# Altium PCB PCB1.PcbDoc (part 3 of 3)
Units mil, origin at the board's own origin, x right, y up, seen from the top; angles counter-clockwise.
Board outline 3051.58 x 3543.22 mil, 2 copper layers (Top Layer, Bottom Layer), stack 22.441 mil thick; 24 components, 24 nets, 64 pads, 1 vias.
Unrouted connection lines stored in the file: 1.
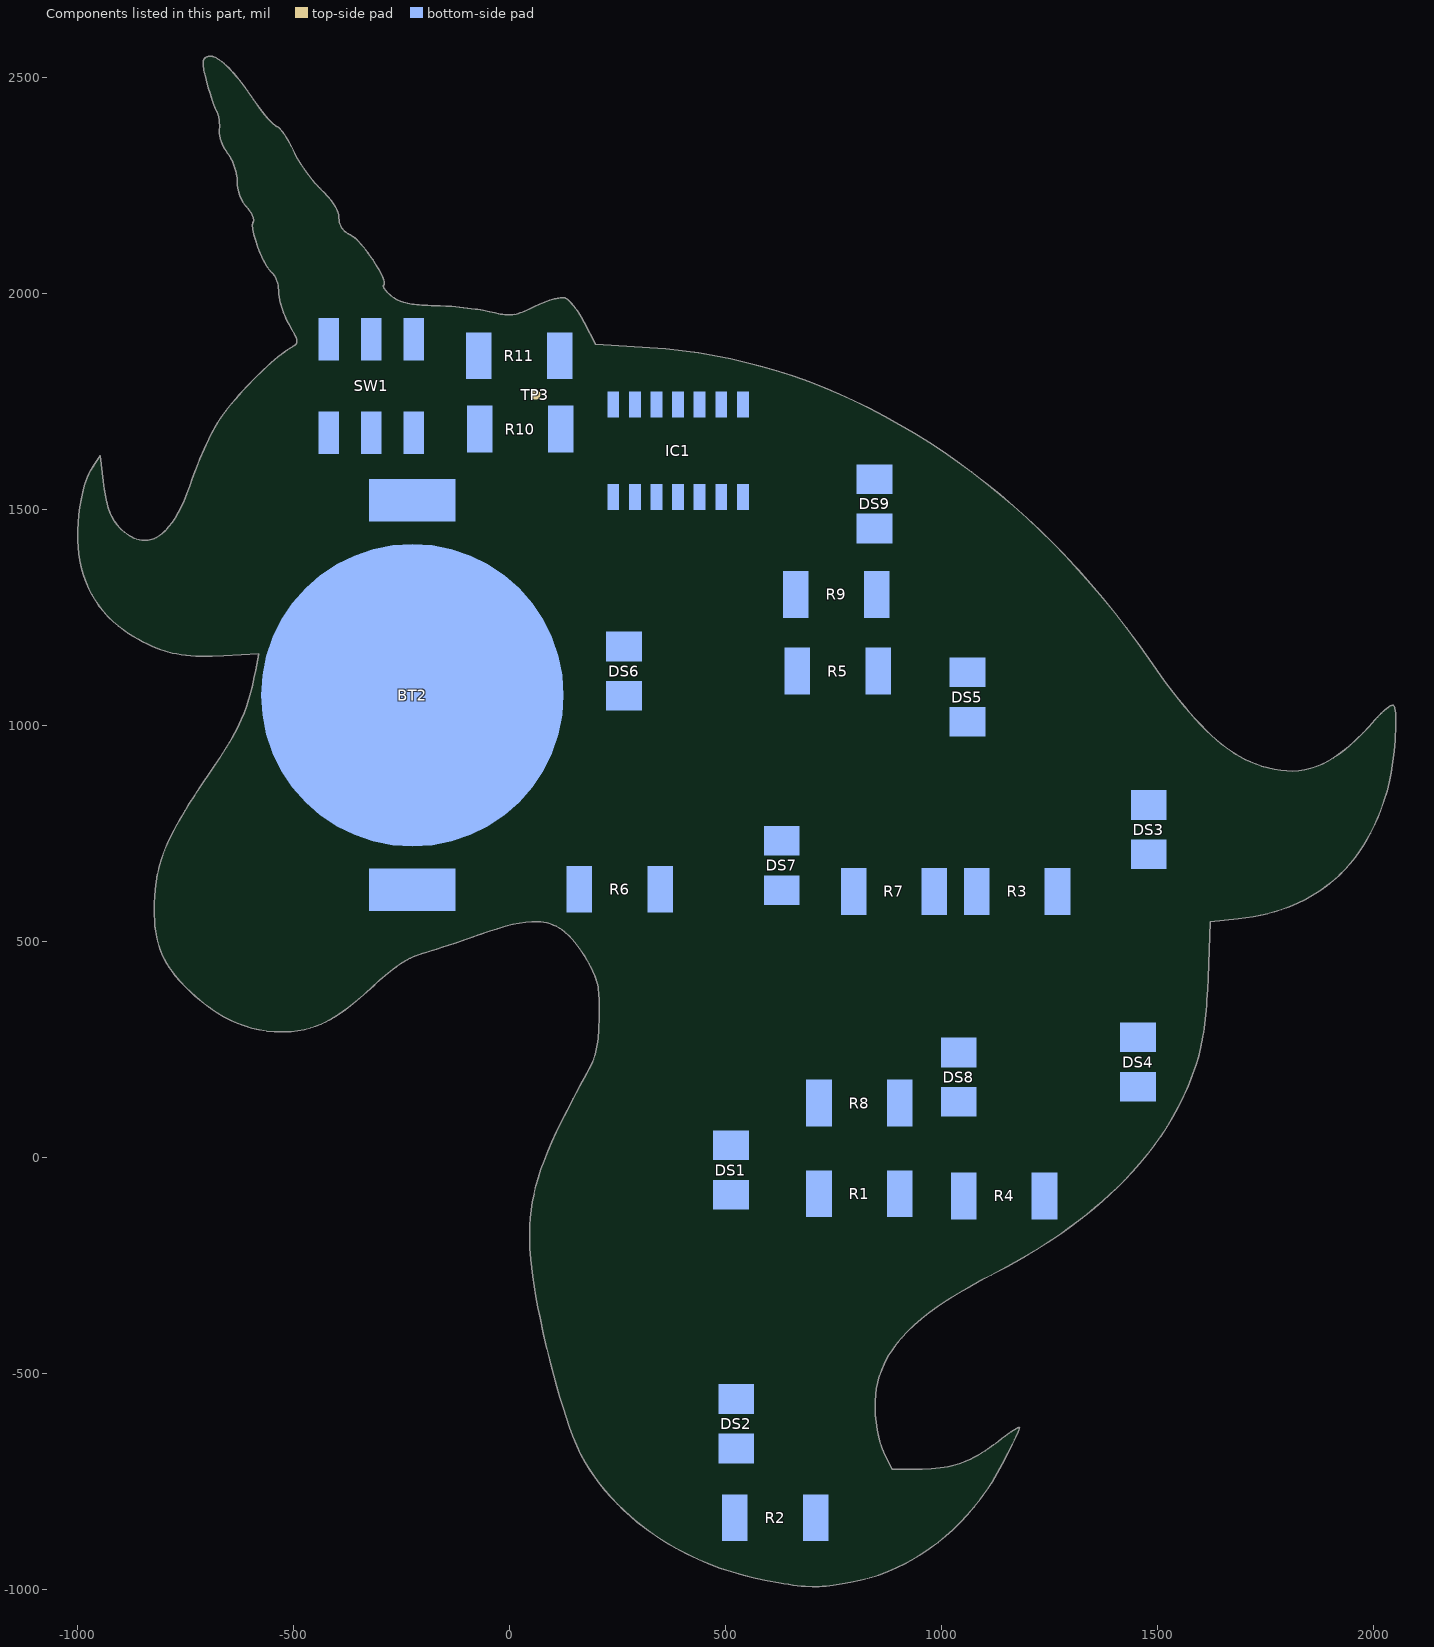
[diagram p3: the components of this part, seen from the top]

## Keep-outs (continued)
Keep-Out Layer: (continued)
  lines w5: 1193.4,-655.34 1196.64,-648.13 ; 1196.64,-648.13 ccw(c1176.13,-638.89) 1196.71,-647.98 ; 1196.64,-648.13 ccw(c1176.13,-638.89) 1196.71,-647.98 ; 1498.02,1166.8 cw(c1479.49,1154.04) 1498.04,1166.78 ; 1498.02,1166.8 cw(c1479.49,1154.04) 1498.04,1166.78 ; 1498.04,1166.78 ccw(c3006.54,2202.82) 1554.33,1089.25 ; 1525.66,34.72 ccw(c875.63,482.19) 1525.69,34.77 ; 1525.66,34.72 ccw(c1507.16,47.53) 1525.68,34.76 ; 1525.68,34.76 ccw(c976.26,413.63) 1611.01,207.46 ccw(c1589.61,214.41) 1611.03,207.51 ccw(c1218.62,333.9) 1615.79,223.39 ; 1554.34,1089.23 ccw(c2460.6,1787.08) 1580.13,1056.97 ; 1554.34,1089.23 ccw(c1536.51,1075.51) 1554.33,1089.25 ; 1580.17,1056.92 ccw(c2228.52,1594.47) 1604.68,1028.65 ; 1580.17,1056.92 cw(c2460.6,1787.08) 1580.13,1056.97 ; 1580.17,1056.92 ccw(c1562.85,1042.55) 1580.17,1056.92 ; 1580.17,1056.92 ccw(c1562.85,1042.55) 1580.13,1056.97 ; 1604.68,1028.65 ccw(c2068.92,1449.61) 1604.73,1028.6 ; 1604.68,1028.65 cw(c1588.02,1013.54) 1604.73,1028.6 ; 1604.68,1028.65 ccw(c1588.02,1013.54) 1604.68,1028.65 ; 1604.73,1028.6 ccw(c2068.92,1449.61) 1628.06,1004.23 ; 1615.79,223.39 ccw(c1180.16,344.59) 1620.08,240.01 ; 1615.79,223.39 ccw(c1594.11,229.42) 1615.79,223.39 ; 1620.08,240.02 ccw(c1125.73,357.51) 1620.09,240.08 ; 1620.08,240.01 ccw(c1598.19,245.22) 1620.09,240.08 ; 1620.09,240.08 ccw(c1125.73,357.51) 1623.91,257.5 ccw(c1050.46,372.62) 1627.31,275.95 ccw(c950.57,389.37) 1630.29,295.47 ccw(c818.89,407.6) 1632.88,316.19 ccw(c646.62,426.99) 1635.11,338.22 ccw(c421.91,447.23) 1636.99,361.61 ; 1628.06,1004.23 ccw(c1961.38,1340.91) 1650.46,983.44 ; 1628.06,1004.23 ccw(c1612.23,988.24) 1628.06,1004.23 ; 1628.06,1004.23 ccw(c1612.23,988.24) 1628.06,1004.23 ; 1636.99,361.61 ccw(c1614.54,363.26) 1636.99,361.69 ; 1636.99,361.61 ccw(c421.91,447.23) 1636.99,361.68 ; 1650.46,983.44 cw(c1635.69,966.47) 1650.51,983.4 ; 1650.46,983.44 ccw(c1891.27,1260.29) 1650.51,983.4 ; 1650.51,983.4 ccw(c1891.27,1260.29) 1672.01,966.08 ; 1672.01,966.08 ccw(c1891.27,1260.29) 1672.06,966.04 ; 1672.01,966.08 cw(c1658.62,948) 1672.06,966.04 ; 1672.06,966.04 ccw(c1848.19,1202.51) 1693.06,951.77 ; 1693.05,951.77 ccw(c1824.15,1163.79) 1693.11,951.74 ; 1693.06,951.77 cw(c1681.22,932.63) 1693.11,951.74 ; 1693.11,951.74 ccw(c1824.15,1163.79) 1713.62,940.36 ; 1713.62,940.36 ccw(c1824.15,1163.79) 1713.67,940.33 ; 1713.62,940.36 cw(c1703.7,920.16) 1713.67,940.33 ; 1713.67,940.33 ccw(c1813.35,1142.16) 1734.14,931.46 ; 1734.14,931.46 ccw(c1813.35,1142.16) 1734.2,931.43 cw(c1726.28,910.37) 1734.49,931.32 ; 1734.14,931.46 cw(c1726.28,910.37) 1734.43,931.34 ccw(c1821.55,1155.58) 1734.49,931.32 ; 1734.49,931.32 ccw(c1821.55,1155.58) 1788.62,917.28 ccw(c1808.95,1076.63) 1812.77,916.03 ; 1743.66,538.02 ccw(c1645.57,998.62) 1793.99,551.69 ; 1743.66,538.02 ccw(c1738.97,560.03) 1743.66,538.02 ; 1793.99,551.69 ccw(c1677.37,911.14) 1921.93,623.06 ccw(c1907.37,640.21) 1922.06,623.17 ccw(c1678.66,905.51) 1986.96,695.96 ; 1812.77,916.03 ccw(c1807.95,1066.81) 1881.98,935.37 ; 1881.98,935.37 cw(c1893.09,915.8) 1882.29,935.54 ; 1881.98,935.37 ccw(c1807.95,1066.81) 1882.04,935.4 cw(c1893.09,915.8) 1882.29,935.54 ; 1882.29,935.54 ccw(c1770.6,1139.7) 1906.46,950.77 ; 1906.46,950.77 ccw(c1713.84,1218.7) 1906.52,950.81 ; 1906.46,950.77 cw(c1919.6,932.5) 1906.52,950.81 ; 1906.46,950.77 ccw(c1919.6,932.5) 1906.46,950.77 ; 1906.52,950.81 ccw(c1713.84,1218.7) 1931.75,970.89 ; 1931.75,970.89 ccw(c1713.84,1218.7) 1931.79,970.94 ; 1931.75,970.89 cw(c1946.66,954.04) 1931.8,970.94 ; 1931.8,970.94 ccw(c1611.48,1335.32) 1958.47,996.24 ; 1931.8,970.94 ccw(c1946.66,954.04) 1931.79,970.94 ; 1958.47,996.24 ccw(c1611.48,1335.32) 1958.51,996.28 ; 1958.47,996.24 cw(c1974.61,980.56) 1958.52,996.29 ; 1958.52,996.29 ccw(c1438.66,1504.56) 1986.82,1026.96 cw(c2003.79,1012.18) 1986.89,1027.03 ; 1958.52,996.29 ccw(c1974.61,980.56) 1958.51,996.28 ; 1986.96,695.96 ccw(c1678.66,905.51) 1986.96,695.96 ; 2016.95,1056.41 ccw(c2083.08,973.02) 2016.94,1056.4 ; 2016.95,1056.41 cw(c2083.08,973.02) 2022.48,1060.51 cw(c2035.29,1042.02) 2022.51,1060.53 ; 2016.95,1056.41 ccw(c2111.6,936.88) 2016.95,1056.41 ; 2022.51,1060.53 cw(c2061.79,1003.93) 2028.06,1064.01 ; 2028.06,1064.01 cw(c2049.38,1026.33) 2034.45,1066.96 ; 2034.45,1066.96 cw(c2044.8,1039.29) 2044.33,1068.83 ; 2044.33,1068.83 cw(c2044.77,1044.07) 2061.6,1062.24 ; 2061.6,1062.24 ccw(c2044.77,1044.07) 2061.6,1062.24 ; 2061.6,1062.24 cw(c2046.31,1045.73) 2065.89,1056.82 cw(c2013.78,1027.3) 2073.67,1027.3 cw(c2013.78,1027.3) 2073.67,1026.91 cw(c1815.28,1008.29) 2074.34,1009.09 ; 2073.95,987.25 ccw(c1599.68,1006.65) 2074.34,1006.65 ccw(c1599.68,1006.65) 2074.34,1009.09 ; 2073.95,987.23 ccw(c1599.68,1006.65) 2073.95,987.25 ; 2074.34,1009.09 ccw(c1599.68,1006.65) 2074.34,1009.12

## Other copper
Top Layer:
  region net AIN6: 1206 vertices and 0 holes, not listed, extent -41.25,1615.18 129.92,1865.32
  region: 788 vertices and 0 holes, not listed, extent -509.92,1907.35 -276.48,2002.33
  region: 1011 vertices and 0 holes, not listed, extent -573.24,2016.94 -314.75,2152.62
  region: 847 vertices and 0 holes, not listed, extent -608.38,2156.45 -415.64,2267.08
  region: 727 vertices and 0 holes, not listed, extent -691.87,2413.55 -598.64,2527.66
  region: 669 vertices and 0 holes, not listed, extent -652.56,2295.61 -507.49,2385.02
  region: -641.82,540.56 -643.55,538.83 -645.99,537.79 -646.68,536.4 -649.11,534.66 -651.89,531.88 -653.28,531.18 -654.67,529.79 -658.15,528.4 -661.62,529.1 -662.66,530.14 -661.97,538.48 -660.58,539.87 -658.84,544.39 -657.1,546.82 -653.98,550.64 -648.42,556.2 -647.03,556.89 -645.64,558.28 -642.16,560.37 -631.74,565.23 -627.23,566.27 -621.32,568.01 -610.9,568.7 -608.81,568.01 -603.95,567.32 -600.48,565.93 -597.7,565.23 -594.22,563.15 -587.97,559.67 -583.45,557.24 -583.1,556.2 -581.71,555.5 -579.28,553.77 -578.94,552.72 -577.55,552.03 -569.56,544.04 -568.86,542.65 -566.08,539.87 -564,536.4 -561.22,531.53 -559.83,530.14 -558.79,525.63 -556.35,519.72 -555.66,510.69 -556.7,499.92 -557.74,498.88 -558.44,497.49 -560.18,495.05 -564,494.01 -568.51,495.75 -572.33,499.57 -574.42,503.04 -575.81,504.43 -576.85,508.26 -579.28,512.77 -580.33,517.98 -582.06,521.8 -582.76,524.58 -586.93,532.23 -588.32,533.62 -589.01,535.01 -592.83,538.83 -594.22,539.52 -596.31,541.61 -603.95,545.08 -606.73,545.78 -610.55,546.82 -613.33,547.51 -622.01,547.86 -624.1,547.17 -627.92,546.12 -631.39,545.43 -634.17,544.73 -638.69,542.3 -641.47,540.91
  region: 299 vertices and 0 holes, not listed, extent -306.22,1002.97 53.7,1203.78
  region net AIN6: 161 vertices and 1 holes, not listed, extent -58.86,1597.05 147.5,1886.79
  region: 2749 vertices and 14 holes, not listed, extent -999.65,-995.35 2052.02,2549.65

## Silkscreen, mask and mechanical layers (free items; w line width, h text height)
Top Overlay:
  region: 10321 vertices and 3 holes, not listed, extent -812.4,247.35 412.93,1972.95
Bottom Overlay:
  text "M. Baloga" at 555,1640.98 h85
  text "CVTI SR" at 555,1580.89 h80
Top Solder:
  drawing of 7 lines, arcs and shapes, not listed